# Altium PCB transistor_tester_V1.07_E3.PcbDoc (part 2 of 2)
Units mil, origin at the board's own origin, x right, y up, seen from the top; angles counter-clockwise.
Board outline 8661.42 x 7437.01 mil, 4 copper layers (Component Side, Ground Plane, Power Plane, Solder Side), stack 33.234 mil thick; 260 components, 161 nets, 897 pads, 860 vias.
Unrouted connection lines stored in the file: 9.
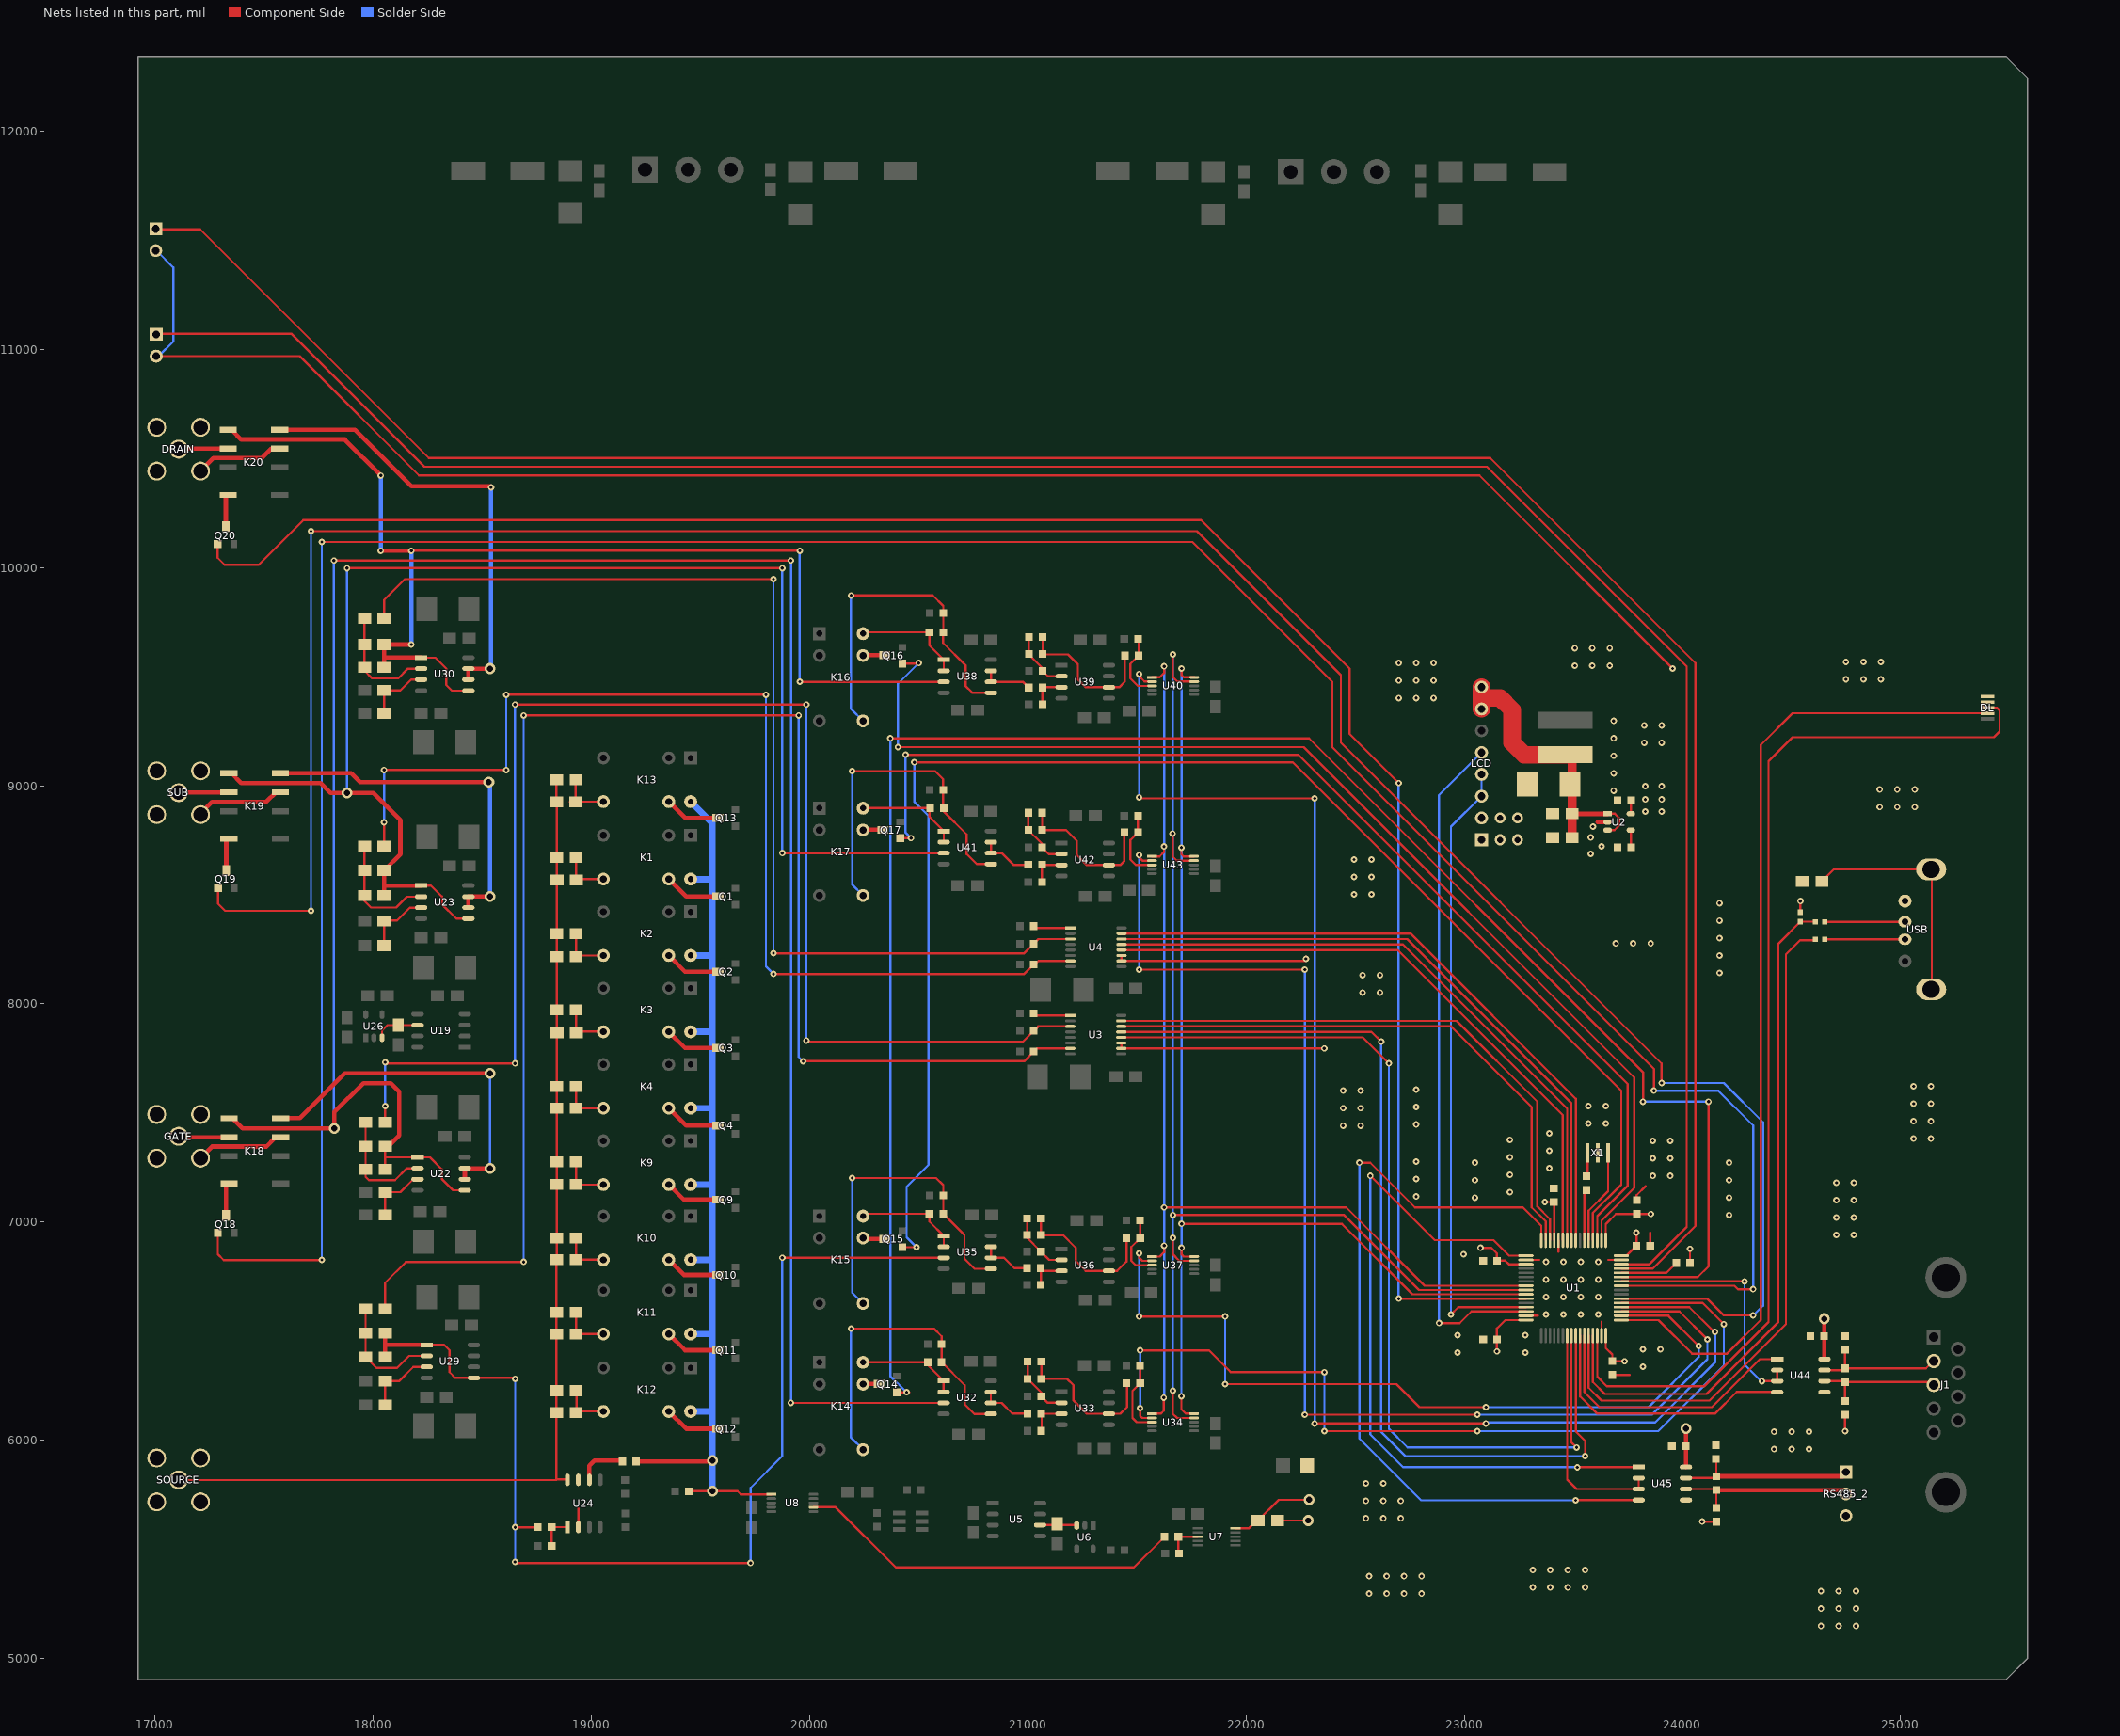
[diagram p4: the nets of this part, all layers, seen from the top]

## Via types
v1: diameter 30/30 (per signal layer), hole 14, Component Side to Solder Side, 720 vias
v2: diameter 50, hole 28, Component Side to Solder Side, 86 vias
v3: diameter 30, hole 14, Component Side to Solder Side, 50 vias
v4: diameter 66.93, hole 47.24, Component Side to Solder Side, 2 vias
v5: diameter 39.37, hole 29.53, Component Side to Solder Side, 2 vias

## Nets (pads, with @x,y where several pads share a name; then routed paths per layer and width w, separated by ;. In a path a pad name is that pad's centre, name@x,y a point inside that pad or via, vN(x,y) a via of type N, cw(c..) or ccw(c..) an arc to the next point about the centre after c; other vN are vias at no path point) (continued)
CTRL14: Q14.1 U1.59 | length 8779
  Component Side w10: v1(20369.38,9217.27) 22289.38,9217.27 23819.38,7687.27 v1(23819.38,7552.27) ; Q14.1@20399.2,6220.02 v1(20443.92,6220.02) v1@20456.17,6220.02 ; U1.59@23719.61,6747.92 24070.03,6747.92 24119.38,6797.27 v1(24119.38,7552.27)
  Solder Side w10: v1(20369.38,9217.27) 20369.38,6294.56 v1(20443.92,6220.02) ; v1(23819.38,7552.27) v1(24119.38,7552.27)
CTRL15: Q15.1 U1.4 | length 6983.9
  Component Side w10: Q15.1@20424.66,6885.02 v1(20489.38,6885.02) v1@20497.13,6885.02 ; v1(20479.38,9107.27) 22214.38,9107.27 23719.38,7602.27 23719.38,7172.27 23589.69,7042.57 U1.4@23589.69,6917.21
  Solder Side w10: v1(20479.38,9107.27) 20479.38,8927.27 20544.38,8862.27 20544.38,7262.27 20444.38,7162.27 20444.38,6930.02 v1(20489.38,6885.02)
CTRL16: Q16.1 U1.2 | length 5301.2
  Component Side w10: v1(20404.38,9177.27) 22264.38,9177.27 23779.38,7662.27 23779.38,7157.27 23629.06,7006.94 U1.2@23629.06,6917.21 ; Q16.1@20424.66,9560.02 v1@20491.62,9560.02
  Solder Side w10: v1(20404.38,9177.27) 20404.38,9467.27 v1(20499.38,9562.27)
CTRL17: Q17.1 U1.3 | length 5150.8
  Component Side w10: Q17.1@20414.66,8760.02 v1(20464.38,8760.02) ; v1(20439.38,9142.27) 22239.38,9142.27 23749.38,7632.27 23749.38,7167.27 23609.37,7027.26 U1.3@23609.37,6917.21
  Solder Side w10: v1(20439.38,9142.27) 20439.38,8785.02 v1(20464.38,8760.02)
CTRL18: Q18.1 U1.57 | length 13189.9
  Component Side w10: Q18.1@17287.27,6950.56 17287.27,6853.08 17314.51,6825.84 v1@17764.51,6825.84 ; v1(17764.38,10117.27) 21754.38,10117.27 22394.38,9477.27 22394.38,9177.27 23869.38,7702.27 v1(23869.38,7602.27) ; U1.57@23719.61,6708.55 24238.1,6708.55 24254.38,6692.27 v1(24324.38,6692.27) 24269.38,6692.27
  Solder Side w10: v1(17764.38,6827.27) v1(17764.38,10117.27) ; v1@23874.38,7602.27 24164.38,7602.27 24324.38,7442.27 v1(24324.38,6692.27)
CTRL19: Q19.1 U1.54 | length 11805.3
  Component Side w10: Q19.1@17288.31,8531.6 17288.31,8459.13 17320.56,8426.88 v1@17715.56,8426.88 ; v1(17714.38,10167.27) 21774.38,10167.27 22434.38,9507.27 22434.38,9197.27 23904.38,7727.27 v1(23904.38,7637.27) ; U1.54@23719.61,6649.49 24112.16,6649.49 24189.38,6572.27 v1(24324.38,6572.27)
  Solder Side w10: v1(17714.38,8427.27) v1(17714.38,10167.27) ; v1(23904.38,7637.27) 24189.38,7637.27 24369.38,7457.27 24369.38,6617.27 v1(24324.38,6572.27)
CTRL20: Q20.1 U1.27 | length 9194.5
  Component Side w10: Q20.1@17286.33,10107.33 17286.33,10044.85 17318.58,10012.61 17474.72,10012.61 17679.38,10217.27 21794.38,10217.27 22474.38,9537.27 22474.38,9237.27 v1(22699.38,9012.27) ; v1(22699.38,6649.49) U1.27@23282.6,6649.49
  Solder Side w10: v1(22699.38,6649.49) v1(22699.38,9012.27)
D1: K1.5 Q1.3 | length 258.1
  Component Side w20: K1.5@19354.38,8572.27 19433.62,8493.02 Q1.3@19579.66,8493.02
D2: K2.5 Q2.3 | length 271
  Component Side w20: K2.5@19354.38,8222.27 19428.62,8148.02 Q2.3@19579.66,8148.02
  Solder Side w10: K2.5@19354.38,8207.27 K2.5@19354.38,8222.27
D3: K3.5 Q3.3 | length 256
  Component Side w20: K3.5@19354.38,7872.27 19428.62,7798.02 Q3.3@19579.66,7798.02
D3V3: C1.2 C2.2 C3.2 C4.2 C5.2 C6.2 C22.2 C29.2 C77.2 C108.2 LED0.2 LED1.2 R42.1 R102.2 R105.2 U1.1 U1.13 U1.19 U1.32 U1.48 U1.64 U2.5 U3.10 U3.11 U4.10 U4.11 U7.10 U44.8 U45.8 | length 12372.6
  Component Side w10: LED1.2@16989.04,10969.18 17662.47,10969.18 18209.38,10422.27 23069.38,10422.27 v1(23954.38,9537.27) ; U3.11@21428.24,7821.28 U3.10@21428.24,7796.08 v1(22358.2,7796.08) ; U4.11@21429.03,8222.07 U4.10@21429.03,8196.87 22268.99,8196.87 22274.38,8202.27 v1(22274.38,8207.27) v1@22274.38,8217.27 ; U7.10@21950.64,5597.27 22014.38,5597.27 C77.2@22069.38,5652.27 ; C77.2@22054.38,5632.27 22149.38,5727.27 v2(22289.38,5727.27) ; v1(23074.38,6882.27) 23124.38,6882.27 23149.62,6857.03 C2.2@23149.62,6823.01 23188.63,6823.01 23204.68,6806.97 U1.19@23282.6,6806.97 ; v1(23149.62,6407.5) C6.2@23149.62,6463.01 23149.62,6512.5 23188.18,6551.06 U1.32@23282.6,6551.06 ; v1@23359.62,7092.03 C1.2@23410.13,7092.03 ; U1.13@23412.52,6917.21 C1.2@23412.52,7092.03 ; U1.48@23648.74,6480.2 23648.74,6422.9 23678.63,6393.01 C5.2@23678.63,6362.5 v1@23734.62,6362.5 ; U1.1@23648.74,6917.21 23648.74,6990.64 23695.13,7037.03 C4.2@23790.13,7037.03 v1(23854.62,7037.03) ; U1.64@23719.61,6846.34 23743.97,6846.34 C3.2@23789.14,6891.52 v1(23789.14,6952.03) ; U2.5@23763.4,8871.44 C22.2@23763.4,8931.79 ; v1(24089.62,5627.03) R105.2@24155.13,5627.03 ; R42.1@24540.4,8420.26 v1(24540.4,8471.24) ; v2(24650.91,6557.27) v2@24650.91,6570.73 ; v1(24745.13,6041.52) R102.2@24745.13,6117.03
  Component Side w20: U45.8@24015.91,5877.27 v2(24015.91,6053.8) ; U44.8@24650.91,6372.27 v2(24650.91,6557.27)
  Solder Side w10: LED1.2@17004.94,10968.7 17016.38,10968.7 17083.75,11036.07 17083.75,11374.96 LED0.2@17005.72,11452.99
  other v1: 23734.38,6362.27 23369.38,7092.27 23829.38,8882.27 23904.38,8882.27 23829.38,8937.27 23904.38,8937.27 23829.38,8997.27 23904.38,8997.27
D4: K4.5 Q4.3 | length 258.1
  Component Side w20: K4.5@19354.38,7522.27 19433.62,7443.02 Q4.3@19579.66,7443.02
D5V0: C57.2 C58.2 C59.1 L2.2 LCD.7 LCD.8 U2.1 U2.3 | length 1367.8
  Component Side w10: U2.3@23657.1,8796.64 23688.75,8796.64 23709.38,8817.27 23709.38,8852.27 23690.21,8871.44 U2.1@23657.1,8871.44
  Component Side w22: C58.2@23495.21,8871.44 U2.1@23657.1,8871.44
  Component Side w40: C57.2@23494.84,8762.72 23494.84,8997.27 L2.2@23494.84,9132.03
  Component Side w80: LCD.7@23079.38,9352.27 LCD.8@23079.38,9452.27 ; 23079.38,9402.27 23164.38,9402.27 23219.38,9347.27 23219.38,9197.27 23274.38,9142.27 L2.2@23464.38,9142.27
D9: K9.5 Q9.3 | length 254
  Component Side w20: K9.5@19354.38,7172.27 19423.62,7103.02 Q9.3@19579.66,7103.02
D10: K10.5 Q10.3 | length 254
  Component Side w20: K10.5@19354.38,6827.27 19423.62,6758.02 Q10.3@19579.66,6758.02
D11: K11.5 Q11.3 | length 256
  Component Side w20: K11.5@19354.38,6487.27 19428.62,6413.02 Q11.3@19579.66,6413.02
D12: K12.5 Q12.3 | length 258.1
  Component Side w20: K12.5@19354.38,6132.27 19433.62,6053.02 Q12.3@19579.66,6053.02
D13: K13.5 Q13.3 | length 246.1
  Component Side w20: K13.5@19354.38,8927.27 19429.38,8852.27 Q13.3@19569.38,8852.27
D14: K14.5 Q14.3 | length 74.8
  Component Side w20: K14.5@20244.38,6258.02 Q14.3@20319.2,6258.02
D15: K15.5 Q15.3 | length 75.3
  Component Side w20: K15.5@20244.38,6923.02 Q15.3@20319.66,6923.02
D16: K16.5 Q16.3 | length 80.3
  Component Side w20: K16.5@20244.38,9598.02 Q16.3@20324.66,9598.02
D17: K17.5 Q17.3 | length 90.3
  Component Side w20: K17.5@20244.38,8798.02 Q17.3@20334.66,8798.02
D18: K18.8 Q18.3 | length 148.3
  Component Side w20: Q18.3@17325.27,7030.56 K18.8@17325.27,7178.86
D19: K19.8 Q19.3 | length 143.3
  Component Side w20: Q19.3@17326.31,8611.6 K19.8@17326.31,8754.91
D20: K20.8 Q20.3 | length 143.3
  Component Side w20: Q20.3@17324.33,10187.33 K20.8@17324.33,10330.63
DAC1_FSYNC: U1.41 U3.13 | length 4551
  Component Side w10: U3.13@21428.24,7871.67 22574.97,7871.67 v1(22619.38,7827.27) ; U1.41@23510.95,6480.2 23510.95,6040.7 23554.38,5997.27 v1(23554.38,5927.27)
  Solder Side w10: v1(22619.38,7827.27) 22619.38,6037.27 22729.38,5927.27 v1(23554.38,5927.27)
DAC1_RESET: U1.14 U3.15 | length 2718.6
  Component Side w10: U3.15@21428.24,7922.07 22964.58,7922.07 23334.38,7552.27 23334.38,7072.27 23392.84,7013.81 U1.14@23392.84,6917.21
DAC1_SCLK: U1.40 U3.12 | length 4368.2
  Component Side w10: U3.12@21428.24,7846.48 22535.17,7846.48 v1(22654.38,7727.27) ; U1.40@23491.26,6480.2 23491.26,5990.38 v1(23514.38,5967.27)
  Solder Side w10: v1(22654.38,7727.27) 22654.38,6052.27 22739.38,5967.27 v1(23514.38,5967.27)
DAC1_SDATA: U1.15 U3.14 | length 2671
  Component Side w10: U3.14@21428.24,7896.87 22939.77,7896.87 ; 22939.58,7897.07 22939.77,7896.87 ; U1.15@23373.15,6917.21 23373.15,7003.49 23309.38,7067.27 23309.38,7527.27 22939.77,7896.87
DAC2_FSYNC: U1.10 U4.13 | length 2957.1
  Component Side w10: U4.13@21429.03,8272.46 22719.18,8272.46 23471.58,7520.07 U1.10@23471.58,6917.21
DAC2_RESET: U1.8 U4.15 | length 3044
  Component Side w10: U4.15@21429.03,8322.86 22753.79,8322.86 23510.95,7565.7 U1.8@23510.95,6917.21
DAC2_SCLK: U1.11 U4.12 | length 2909.2
  Component Side w10: U4.12@21429.03,8247.27 22694.38,8247.27 23451.89,7489.75 U1.11@23451.89,6917.21
DAC2_SDATA: U1.9 U4.14 | length 3002
  Component Side w10: U4.14@21429.03,8297.66 22738.99,8297.66 23491.26,7545.38 U1.9@23491.26,6917.21
DGND: C1.1 C2.1 C3.1 C4.1 C5.1 C6.1 C21.1 C22.1 C29.1 C57.1 C58.1 C59.2 C77.1 C108.1 DL.5 L1.2 L3.2 LCD.1 LCD.2 R2.2 R101.2 R104.2 RS485_2.3 U1.12 U1.18 U1.31 U1.47 U1.63 U2.2 U44.5 U45.5 USB.4 X1.2 | length 764.3
  Component Side w10: C77.1@22144.38,5632.27 v2(22284.38,5632.27) ; U1.31@23282.6,6570.75 23337.86,6570.75 ; U1.18@23282.6,6826.66 23343.77,6826.66 ; 23432.21,6864.44 U1.12@23432.21,6917.21 ; U1.47@23629.06,6480.2 23629.06,6543.74 ; 23659.99,6826.66 U1.63@23719.61,6826.66 ; C5.1@23678.63,6299.51 23757.68,6299.51 ; C4.1@23790.13,7100.02 23790.13,7123.71 23831.7,7165.28 ; C3.1@23852.14,6891.52 23852.14,6951.45 ; R2.2@24034.62,6813.01 v1(24034.62,6877.5)
  Component Side w20: 23611.15,8834.04 U2.2@23657.1,8834.04
  other v1: 24635.03,5148.34 24715.03,5148.34 24795.03,5148.34 24635.03,5228.34 24715.03,5228.34 24795.03,5228.34 22564.38,5297.27 22644.38,5297.27 22724.38,5297.27 22804.38,5297.27 24635.03,5308.34 24715.03,5308.34 24795.03,5308.34 23314.57,5325.13 23394.57,5325.13 23474.57,5325.13 23554.57,5325.13 22564.38,5377.27 22644.38,5377.27 22724.38,5377.27 22804.38,5377.27 23314.57,5405.13 23394.57,5405.13 23474.57,5405.13 23554.57,5405.13 22549.38,5642.27 22629.38,5642.27 22709.38,5642.27 22549.38,5722.27 22629.38,5722.27 22709.38,5722.27 22549.38,5802.27 22629.38,5802.27 24419.84,5959.26 24499.84,5959.26 24579.84,5959.26 24419.84,6039.26 24499.84,6039.26 24579.84,6039.26 23819.38,6337.27 22969.38,6402.27 23279.38,6402.27 23819.38,6417.27 23899.38,6417.27 22969.38,6482.27 23279.38,6482.27 23374.38,6577.27 23454.38,6577.27 23534.38,6577.27 23614.38,6577.27 23374.38,6657.27 23454.38,6657.27 23534.38,6657.27 23614.38,6657.27 23374.38,6737.27 23454.38,6737.27 23534.38,6737.27 23614.38,6737.27 23374.38,6817.27 23454.38,6817.27 23534.38,6817.27 23614.38,6817.27 22996.59,6852.76 24705.82,6940.97 24785.82,6940.97 24705.82,7020.97 24785.82,7020.97 24214.38,7032.27 24705.82,7100.97 24785.82,7100.97 23049.38,7112.27 24214.38,7112.27 22779.38,7117.27 23209.38,7137.27 24705.82,7180.97 24785.82,7180.97 23049.38,7192.27 24214.38,7192.27 22779.38,7197.27 23864.38,7212.27 23944.38,7212.27 23209.38,7217.27 23389.38,7247.27 23049.38,7272.27 24214.38,7272.27 22779.38,7277.27 23864.38,7292.27 23944.38,7292.27 23209.38,7297.27 23389.38,7327.27 23864.38,7372.27 23944.38,7372.27 23209.38,7377.27 25059.38,7382.27 25139.38,7382.27 23389.38,7407.27 22444.38,7442.27 22524.38,7442.27 22779.38,7447.27 23569.38,7452.27 23649.38,7452.27 25059.38,7462.27 25139.38,7462.27 22444.38,7522.27 22524.38,7522.27 22779.38,7527.27 23569.38,7532.27 23649.38,7532.27 25059.38,7542.27 25139.38,7542.27 22444.38,7602.27 22524.38,7602.27 22779.38,7607.27 25059.38,7622.27 25139.38,7622.27 22534.38,8052.27 22614.38,8052.27 22534.38,8132.27 22614.38,8132.27 24169.38,8142.27 24169.38,8222.27 23694.38,8277.27 23774.38,8277.27 23854.38,8277.27 24169.38,8302.27 24169.38,8382.27 24169.38,8462.27 22494.38,8502.27 22574.38,8502.27 22494.38,8582.27 22574.38,8582.27 22494.38,8662.27 22574.38,8662.27 23579.38,8687.27 23629.38,8722.27 23579.38,8762.27 23589.38,8812.27 24904.38,8902.27 24984.38,8902.27 25064.38,8902.27 23684.38,8977.27 24904.38,8982.27 24984.38,8982.27 25064.38,8982.27 23684.38,9057.27 23684.38,9137.27 23824.38,9197.27 23904.38,9197.27 23684.38,9217.27 23824.38,9277.27 23904.38,9277.27 23684.38,9297.27 22699.38,9402.27 22779.38,9402.27 22859.38,9402.27 22699.38,9482.27 22779.38,9482.27 22859.38,9482.27 24749.38,9487.27 24829.38,9487.27 24909.38,9487.27 23506.79,9550.68 23586.79,9550.68 23666.79,9550.68 22699.38,9562.27 22779.38,9562.27 22859.38,9562.27 24749.38,9567.27 24829.38,9567.27 24909.38,9567.27 23506.79,9630.68 23586.79,9630.68 23666.79,9630.68
  other v2: 23164.38,8752.27 23244.38,8752.27 23164.38,8852.27 23244.38,8852.27
DRAIN_GUARD: K20.4 U30.6 U30.7 | length 2050
  Component Side w20: K20.4@17559.33,10631.53 17915.12,10631.53 18174.38,10372.27 18534.38,10372.27 v3(18539.38,10367.27) ; U30.6@18435.91,9497.27 U30.7@18435.91,9527.27 ; U30.7@18435.91,9536.87 v2@18534.38,9536.87
  Solder Side w20: v2(18534.38,9537.27) 18539.38,9542.27 v3(18539.38,10367.27)
DRAIN_OUT: C74.1 R24.1 U4.3 | length 5017.2
  Component Side w10: R24.1@18049.38,9767.27 18049.38,9852.27 18144.38,9947.27 v3(19834.38,9947.27) ; v3@19829.38,8232.27 v3(19834.38,8232.27) 20982.88,8232.27 C74.1@21027.14,8276.52 21048.28,8297.66 U4.3@21195.17,8297.66
  Solder Side w10: v3(19834.38,8232.27) v3(19834.38,9947.27)
DRAIN_SIGNAL: C38.2 K20.5 R25.2 U30.1 U30.5 U38.3 | length 5433
  Component Side w10: v3(18174.38,10077.27) v3(19954.38,10077.27) ; U30.1@18219.38,9587.27 18284.38,9587.27 18334.38,9537.27 18334.38,9462.27 18360.56,9436.08 U30.5@18435.91,9436.08 ; v3@19954.38,9476.48 U38.3@20614.38,9476.48
  Component Side w20: K20.5@17354.38,10627.27 17394.38,10587.27 17869.38,10587.27 v3(18034.38,10422.27) ; v3(18034.38,10077.27) v3(18174.38,10077.27) ; R25.2@18049.38,9542.27 18049.38,9587.27 ; v3@18164.38,9647.27 C38.2@18049.38,9647.27 18049.38,9587.27 ; U30.1@18219.38,9587.27 18049.38,9587.27
  Solder Side w10: v3(19954.38,9477.27) v3(19954.38,10077.27)
  Solder Side w20: v3(18034.38,10077.27) v3(18034.38,10422.27) ; v3(18174.38,9647.27) v3(18174.38,10077.27)
GATE_GUARD: K18.4 U22.6 U22.7 | length 1661.1
  Component Side w20: K18.4@17559.33,7476.53 17663.64,7476.53 17869.38,7682.27 v2(18534.38,7682.27) ; U22.6@18419.38,7196.48 U22.7@18419.38,7246.87 v2(18534.38,7246.87)
  Solder Side w10: v2(18534.38,7246.87) v2(18534.38,7682.27)
GATE_OUT: C71.1 R14.1 U3.3 | length 6625.9
  Component Side w10: R14.1@18054.38,7457.27 v3(18054.38,7532.27) ; v3(18054.38,7732.27) 18059.38,7727.27 v3(18649.38,7727.27) ; v3(18649.38,9372.27) v3(19984.38,9372.27) ; v3@19984.38,7827.27 20977.88,7827.27 C71.1@21027.14,7876.52 21047.49,7896.87 U3.3@21194.38,7896.87
  Solder Side w10: v3(18054.38,7532.27) v3(18054.38,7732.27) ; v3(18649.38,7727.27) v3@18649.38,9367.27 ; v3(19984.38,7832.27) v3(19984.38,9372.27)
GATE_SIGNAL: C40.2 K18.5 R15.2 U22.1 U22.5 U32.3 | length 11027.3
  Component Side w10: v3(17819.38,10032.27) v3(19914.38,10032.27) ; R15.2@18054.38,7242.27 C40.2@18054.38,7347.27 ; 18059.38,7297.27 U22.1@18202.84,7297.27 18259.38,7297.27 18314.38,7242.27 18314.38,7197.27 18365.56,7146.08 U22.5@18419.38,7146.08 ; v3@19908.59,6171.48 U32.3@20613.92,6171.48
  Component Side w20: K18.5@17358.38,7473.27 17401.38,7430.27 v2(17821.38,7430.27) 17821.38,7504.27 17954.38,7637.27 18079.38,7637.27 18119.38,7597.27 18119.38,7397.27 18069.38,7347.27 C40.2@18054.38,7347.27
  Solder Side w10: v3(17819.38,10032.27) 17819.38,7432.27 v2(17821.38,7430.27) ; v3(19914.38,6172.27) v3(19914.38,10032.27)
LED0: LED0.1 U1.61 | length 10879.9
  Component Side w10: LED0.1@17003.35,11549.96 17206.68,11549.96 18254.38,10502.27 23119.38,10502.27 24059.38,9562.27 24059.38,6982.27 23864.4,6787.29 U1.61@23719.61,6787.29
LED1: LED1.1 U1.62 | length 10586
  Component Side w10: LED1.1@17004.79,11070.91 17625.73,11070.91 18234.38,10462.27 23104.38,10462.27 24019.38,9547.27 24019.38,6977.27 23849.08,6806.97 U1.62@23719.61,6806.97
M_ADC_CS1: U1.53 U34.2 | length 4184.4
  Component Side w10: v1(21514.38,6147.27) 21514.38,6112.27 21524.06,6102.58 U34.2@21568.92,6102.58 ; v1(21514.38,6412.27) 21829.38,6412.27 21929.38,6312.27 v1(22359.38,6312.27) ; v1(22359.38,6042.27) v1(23059.38,6042.27) ; U1.53@23719.61,6629.8 23720.15,6629.27 24092.38,6629.27 v1(24189.38,6532.27)
  Solder Side w10: v1(21514.38,6147.27) v1(21514.38,6412.27) v1@21514.38,6422.27 ; v1(22359.38,6042.27) v1(22359.38,6312.27) ; v1@23054.38,6042.27 v1(23059.38,6042.27) 23889.38,6042.27 24189.38,6342.27 v1(24189.38,6532.27)
M_ADC_CS2: U1.50 U37.2 | length 3852
  Component Side w10: v1(21509.38,6567.27) v1(21904.38,6567.27) ; v1(21509.38,6857.27) 21509.38,6837.27 21524.06,6822.58 U37.2@21569.38,6822.58 ; v1(21904.38,6257.27) 22689.38,6257.27 22794.38,6152.27 v1(23099.38,6152.27) ; U1.50@23719.61,6570.75 23935.9,6570.75 v1(24074.38,6432.27)
  Solder Side w10: v1(21509.38,6567.27) v1(21509.38,6857.27) ; v1(21904.38,6257.27) v1(21904.38,6567.27) ; v1(23099.38,6152.27) 23844.38,6152.27 24074.38,6382.27 v1(24074.38,6432.27)
M_ADC_CS3: U1.52 U40.2 | length 6882.1
  Component Side w10: v1@21509.38,8942.27 v1(22314.38,8942.27) ; v1@21509.38,9502.27 21534.06,9477.58 U40.2@21569.38,9477.58 U40.2@21574.38,9477.58 ; v1@22309.38,6077.27 v1(22314.38,6077.27) v1(23099.38,6077.27) ; U1.52@23719.61,6610.12 24031.53,6610.12 24141.88,6499.77 v1@24151.88,6499.77
  Solder Side w10: v1(21509.38,8947.27) v1(21509.38,9512.27) ; v1(22314.38,6077.27) v1(22314.38,8942.27) ; v1@23099.38,6082.27 23874.38,6082.27 24149.38,6357.27 v1(24149.38,6497.27)
M_ADC_CS4: U1.51 U43.2 | length 5889.4
  Component Side w10: v1(21509.38,8157.27) v1(22269.38,8157.27) ; v1(21509.38,8682.27) 21509.38,8672.9 21524.38,8657.9 21524.38,8656.64 U43.2@21568.43,8656.64 ; v1(22269.38,6117.27) v1(23059.38,6117.27) ; U1.51@23719.61,6590.43 23986.21,6590.43 v1(24114.38,6462.27)
  Solder Side w10: v1(21509.38,8157.27) v1(21509.38,8682.27) ; v1(22269.38,6117.27) v1(22269.38,8157.27) ; v1(23059.38,6117.27) 23859.38,6117.27 24114.38,6372.27 v1(24114.38,6462.27)
M_ADC_DIN: U1.26 U34.10 U37.10 U40.10 U43.10 | length 5449
  Component Side w10: v1(21703.43,8716.32) 21703.43,8686.32 21713.43,8676.32 U43.10@21761.35,8676.32 ; v1(21703.92,6202.27) 21703.92,6142.27 21723.92,6122.27 U34.10@21761.84,6122.27 ; v1(21704.38,6882.27) 21704.38,6852.27 21714.38,6842.27 U37.10@21762.29,6842.27 ; v1(21704.38,6992.27) 22439.38,6992.27 22762.47,6669.18 U1.26@23282.6,6669.18 ; v1(21704.38,9537.27) 21704.38,9507.27 21714.38,9497.27 U40.10@21762.29,9497.27
  Solder Side w10: v1(21703.92,6202.27) v1@21703.92,6881.81 ; v1(21704.38,6882.27) v1(21704.38,6992.27) v1(21704.38,9537.27)
M_ADC_DOUT: U1.25 U34.9 U37.9 U40.9 U43.9 | length 5953.9
  Component Side w10: v1(21663.43,8781.32) 21663.43,8676.32 21683.12,8656.64 U43.9@21761.35,8656.64 ; v1(21663.92,6227.27) 21663.92,6122.27 21683.61,6102.58 U34.9@21761.84,6102.58 ; v1(21664.38,6927.27) 21664.38,6852.27 21694.06,6822.58 U37.9@21762.29,6822.58 ; v1(21664.38,7032.27) 22449.38,7032.27 22792.79,6688.86 U1.25@23282.6,6688.86 ; v1(21664.38,9602.27) 21664.38,9497.27 21684.06,9477.58 U40.9@21762.29,9477.58
  Solder Side w10: v1@21664.38,6227.27 v1(21664.38,6927.27) v1(21664.38,7032.27) v1(21664.38,9602.27)
M_ADC_SCLK: U1.24 U34.1 U37.1 U40.1 U43.1 | length 5542.4
  Component Side w10: U43.1@21568.43,8676.32 21603.43,8676.32 21623.43,8696.32 v1(21623.43,8721.32) ; U34.1@21568.92,6122.27 21608.92,6122.27 21622.67,6136.02 v1(21622.67,6196.02) ; U37.1@21569.38,6842.27 21604.38,6842.27 21624.38,6862.27 v1@21624.38,6887.27 ; U40.1@21569.38,9497.27 21604.38,9497.27 21624.38,9517.27 v1@21624.38,9542.27 ; v1(21624.38,7067.27) 22459.38,7067.27 22818.1,6708.55 U1.24@23282.6,6708.55
  Solder Side w10: v1(21622.67,6196.02) v1@21623.92,6197.27 ; v1@21624.38,6197.72 v1(21624.38,6892.27) v1(21624.38,7067.27) v1(21624.38,9547.27)
NetC21_2: C21.2 U2.4 | length 77.4
  Component Side w10: C21.2@23763.4,8719.23 U2.4@23763.4,8796.64
NetC38_1: C38.1 R24.2 R25.1 U30.2 | length 518
  Component Side w10: R24.2@17959.38,9752.27 C38.1@17959.38,9647.27 R25.1@17959.38,9542.27 17959.38,9527.27 17994.38,9492.27 18114.38,9492.27 18158.99,9536.87 U30.2@18219.38,9536.87
NetC39_1: C39.1 R20.1 R21.2 U23.2 | length 543
  Component Side w10: R21.2@17959.38,8722.27 C39.1@17959.38,8612.27 R20.1@17959.38,8497.27 17959.38,8472.27 17989.38,8442.27 18104.38,8442.27 18153.99,8491.87 U23.2@18219.38,8491.87
NetC40_1: C40.1 R14.2 R15.1 U22.2 | length 517.3
  Component Side w10: R14.2@17964.38,7457.27 C40.1@17964.38,7347.27 R15.1@17964.38,7242.27 17964.38,7207.27 17979.38,7192.27 18099.38,7192.27 18153.99,7246.87 U22.2@18202.84,7246.87
NetC41_2: C41.2 R18.2 R19.1 U29.2 | length 543.3
  Component Side w10: R18.2@17964.38,6602.27 C41.2@17964.38,6492.27 R19.1@17964.38,6382.27 18014.38,6332.27 18109.38,6332.27 18163.99,6386.87 U29.2@18244.38,6386.87
NetC63_1: C63.1 K1.4 R4.2 | length 209.7
  Component Side w10: C63.1@18929.38,8573.55 R4.2@18929.38,8658.29 ; C63.1@18934.38,8572.27 K1.4@19054.38,8572.27 K1.4@19059.38,8572.27
NetC63_2: C63.2 C64.2 C65.2 C66.2 C100.2 C101.2 C102.2 C103.2 C104.2 R4.1 R5.1 R6.1 R7.1 R46.1 R47.1 R48.1 R49.1 R50.1 SOURCE.1 U24.8 | length 5150.2
  Component Side w10: SOURCE.1@17072.21,5817.58 18839.38,5817.58 C103.2@18839.38,6127.27 R49.1@18839.38,6222.27 ; C104.2@18839.14,8926.52 R50.1@18839.14,9007.54 ; 18839.38,5820.88 18877.84,5820.88 ; R49.1@18839.38,6227.27 C102.2@18839.38,6487.27 R48.1@18839.38,6587.27 C101.2@18839.38,6827.27 ; C65.2@18840.92,7883.8 R6.1@18840.92,7957.91 ; C63.2@18840.92,8574.02 R4.1@18840.92,8658.76 ; C101.2@18841.39,6827.27 C65.2@18841.39,7868.44 C63.2@18841.39,8567.27 C104.2@18841.39,8927.27
NetC64_1: C64.1 K2.4 R5.2 | length 203.9
  Component Side w10: C64.1@18929.38,8223.12 R5.2@18929.38,8307.86 ; C64.1@18940.23,8222.27 K2.4@19054.38,8222.27 K2.4@19059.38,8222.27
NetC65_1: C65.1 K3.4 R6.2 | length 204.3
  Component Side w10: C65.1@18928.91,7873.17 R6.2@18928.91,7957.91 ; C65.1@18933.91,7873.17 K3.4@19053.48,7873.17
NetC66_1: C66.1 K4.4 R7.2 | length 225
  Component Side w10: R7.2@18929.38,7622.27 C66.1@18929.38,7522.27 K4.4@19054.38,7522.27
NetC73_1: C73.1 U4.1 | length 165.8
  Component Side w10: C73.1@21029.38,8348.05 U4.1@21195.17,8348.05
NetC76_1: C76.1 U3.1 | length 158
  Component Side w10: C76.1@21036.39,7947.27 U3.1@21194.38,7947.27
NetC80_1: C80.1 R13.2 U7.3 | length 163.7
  Component Side w10: C80.1@21689.62,5484.04 R13.2@21689.62,5557.9 ; R13.2@21689.62,5558.01 R13.2@21689.62,5557.9 ; U7.3@21779.38,5557.9 R13.2@21689.62,5557.9
NetC91_2: C91.2 U5.6 U6.3 | length 167.8
  Component Side w10: U5.6@21055.91,5611.48 U6.3@21223.75,5611.48
NetC92_2: C92.2 U19.6 U26.3 | length 206.2
  Component Side w10: U26.3@18040.01,7844.98 18040.01,7877.9 18065.17,7903.05 U19.6@18202.84,7903.05
NetC100_1: C100.1 K9.4 R46.2 | length 230.6
  Component Side w10: R46.2@18929.38,7277.27 C100.1@18929.38,7172.27 18929.66,7171.99 C100.1@18929.66,7176.99 ; C100.1@18933.91,7171.99 K9.4@19054.1,7171.99
NetC101_1: C101.1 K10.4 R47.2 | length 198
  Component Side w10: C101.1@18929.38,6842.27 R47.2@18929.38,6927.27 ; C101.1@18941.39,6827.27 K10.4@19054.38,6827.27
NetC102_1: C102.1 K11.4 R48.2 | length 216
  Component Side w10: C102.1@18929.38,6494.27 R48.2@18929.38,6587.27 ; C102.1@18931.39,6487.27 K11.4@19054.38,6487.27
NetC103_1: C103.1 K12.4 R49.2 | length 210.2
  Component Side w10: C103.1@18932.14,6131.52 C103.1@18932.14,6132.27 ; R49.2@18932.14,6219.51 C103.1@18932.14,6132.27 ; K12.4@19054.38,6132.27 C103.1@18932.14,6132.27
NetC104_1: C104.1 K13.4 R50.2 | length 232.5
  Component Side w10: C104.1@18902.14,8926.52 C104.1@18927.14,8927.27 ; R50.2@18927.14,9007.54 C104.1@18927.14,8927.27 ; K13.4@19054.38,8927.27 C104.1@18927.14,8927.27
NetC128_1: C128.1 R65.1 R66.2 U33.6 | length 686.5
  Component Side w10: C128.1@21062.14,6361.52 R65.1@21062.14,6281.52 21180.13,6281.52 21209.38,6252.27 21209.38,6182.27 21270.17,6121.48 U33.6@21370.91,6121.48 21423.59,6121.48 21454.38,6152.27 R66.2@21454.38,6246.52
NetC128_2: C128.2 R64.1 R65.2 U33.2 | length 290.6
  Component Side w10: C128.2@20999.14,6361.52 R65.2@20999.14,6281.52 21062.14,6218.53 R64.1@21062.14,6201.52 21091.78,6171.87 U33.2@21154.38,6171.87
NetC131_2: C131.2 R66.1 U34.3 | length 353
  Component Side w10: C131.2@21514.62,6343.01 21514.62,6261.99 21479.38,6226.75 21479.38,6102.27 21499.06,6082.58 U34.3@21568.92,6082.58
NetC138_2: C138.2 R73.1 U37.3 | length 305.2
  Component Side w10: R73.1@21514.62,6926.99 C138.2@21514.62,7008.01 ; R73.1@21515.09,6926.52 21474.38,6885.81 21474.38,6822.27 21493.75,6802.9 U37.3@21569.38,6802.9
NetC142_1: C142.1 R72.1 R73.2 U36.6 | length 695.6
  Component Side w10: C142.1@21060.09,7016.52 R72.1@21060.09,6940.64 21161,6940.64 21219.38,6882.27 21219.38,6822.27 21265.17,6776.48 U36.6@21370.91,6776.48 21408.59,6776.48 21452.1,6819.98 R73.2@21452.1,6926.52
NetC142_2: C142.2 R71.1 R72.2 U36.2 | length 287.8
  Component Side w10: C142.2@20997.1,7016.52 R72.2@20997.1,6940.64 20997.1,6927.76 R71.1@21060.09,6864.77 21097.98,6826.87 U36.2@21154.38,6826.87
NetC149_2: C149.2 R80.1 U40.3 | length 310.6
  Component Side w10: C149.2@21507.14,9673.01 R80.1@21507.14,9596.52 21469.38,9558.76 21469.38,9492.27 21503.75,9457.9 U40.3@21569.38,9457.9
NetC158_1: C158.1 R79.1 R80.2 U39.6 | length 682.7
  Component Side w10: R79.1@21067.14,9604.39 C158.1@21067.14,9681.52 ; R79.1@21072.14,9602.27 21184.38,9602.27 21229.38,9557.27 21229.38,9487.27 21265.17,9451.48 U39.6@21370.91,9451.48 21418.59,9451.48 21444.14,9477.03 R80.2@21444.14,9596.52
NetC158_2: C158.2 R78.1 R79.2 U39.2 | length 278.1
  Component Side w10: C158.2@21004.14,9681.52 R79.2@21004.14,9604.39 21004.14,9601.52 21067.14,9538.53 R78.1@21067.14,9527.27 21092.53,9501.87 U39.2@21154.38,9501.87
NetC159_1: C159.1 R86.1 R87.2 U42.6 | length 700.4
  Component Side w10: C159.1@21065.09,8876.52 R86.1@21065.09,8796.89 21174.75,8796.89 21224.38,8747.27 21224.38,8682.27 21270.17,8636.48 U42.6@21370.91,8636.48 21423.59,8636.48 21442.1,8654.98 R87.2@21442.1,8786.52
NetC159_2: C159.2 R85.1 R86.2 U42.2 | length 287.2
  Component Side w10: C159.2@21002.1,8876.52 R86.2@21002.1,8796.89 21065.09,8733.9 R85.1@21065.09,8717.27 21095.48,8686.87 U42.2@21154.38,8686.87
NetC161_2: C161.2 R87.1 U43.3 | length 324.6
  Component Side w10: R87.1@21504.62,8786.99 C161.2@21504.62,8863.01 ; R87.1@21505.09,8786.52 21469.38,8750.81 21469.38,8662.27 21494.69,8636.95 U43.3@21568.43,8636.95
NetDRAIN_1: DRAIN.1 K20.6 | length 201.9
  Component Side w20: DRAIN.1@17118.18,10545.73 K20.6@17320.12,10545.73
NetDRAIN_2: DRAIN.2 K20.3 | length 364.2
  Component Side w20: DRAIN.2@17208.99,10443.82 17267.35,10502.17 17488.68,10502.17 ; 17489.38,10502.27 17532.03,10544.91
NetGATE_1: GATE.1 K18.6 | length 203.7
  Component Side w20: GATE.1@17115.56,7389.27 K18.6@17319.29,7389.27
NetGATE_2: GATE.2 K18.3 | length 378.4
  Component Side w20: GATE.2@17208.6,7293.88 17261.01,7346.28 17509.44,7346.28 K18.3@17548.91,7385.75
NetJ1_2: J1.2 R100.1 R101.1 U44.7 | length 598
  Component Side w10: U44.7@24650.91,6321.87 R100.1@24741.98,6321.87 ; R101.1@24745.13,6414.51 R100.1@24745.13,6330.02 25116.17,6330.02 J1.2@25152.51,6366.36
NetJ1_3: J1.3 R100.2 R102.1 U44.6 | length 577.3
  Component Side w10: U44.6@24650.91,6271.48 R100.2@24745.68,6271.48 ; R102.1@24745.13,6180.02 R100.2@24745.13,6267.03 ; R100.2@24745.68,6267.03 J1.3@25141.22,6267.03
NetK14_4: K14.4 R60.2 R61.1 U32.5 | length 1501
  Component Side w10: v1(20189.38,6512.27) 20568.92,6512.27 20604.63,6476.56 R61.1@20604.63,6441.52 20604.63,6358.49 20710.85,6252.27 20710.85,6165.34 20755.1,6121.08 U32.5@20830.46,6121.08
  Solder Side w10: v1(20189.38,6512.27) 20189.38,6012.27 K14.4@20244.38,5957.27
NetK14_6: K14.6 R60.1 U32.1 U32.2 | length 463.1
  Component Side w10: K14.6@20244.38,6358.01 R60.1@20541.17,6358.01 20541.17,6345.02 U32.1@20613.92,6272.27 U32.2@20613.92,6221.87
NetK15_4: K15.4 R67.2 R68.1 U35.5 | length 1545.2
  Component Side w10: v1(20194.38,7202.27) 20579.38,7202.27 20612.14,7169.51 R68.1@20612.14,7121.52 20612.14,7038.49 20709.38,6941.24 20709.38,6832.27 20755.56,6786.08 U35.5@20830.91,6786.08
  Solder Side w10: v1(20194.38,7202.27) 20194.38,6677.27 K15.4@20244.38,6627.27
NetK15_6: K15.6 R67.1 U35.1 U35.2 | length 482.7
  Component Side w10: K15.6@20244.38,7038.01 R67.1@20548.67,7038.01 20548.67,7002.97 U35.1@20614.38,6937.27 U35.2@20614.38,6886.87
NetK16_4: K16.4 R74.2 R75.1 U38.5 | length 1579.1
  Component Side w10: v1(20189.38,9872.27) 20564.38,9872.27 20612.14,9824.51 R75.1@20612.14,9791.52 R74.2@20612.14,9703.49 ; R74.2@20611.66,9703.01 20611.66,9654.98 20714.38,9552.27 20714.38,9457.27 20745.56,9426.08 U38.5@20830.91,9426.08
  Solder Side w10: v1(20189.38,9872.27) 20189.38,9352.27 K16.4@20244.38,9297.27
NetK16_6: K16.6 R74.1 U38.1 U38.2 | length 507.7
  Component Side w10: K16.6@20244.38,9703.01 R74.1@20548.67,9703.01 20548.67,9642.97 U38.1@20614.38,9577.27 U38.2@20614.38,9526.87
NetK17_4: K17.4 R81.2 R82.1 U41.5 | length 1520.2
  Component Side w10: v1(20194.38,9067.27) 20574.38,9067.27 20611.66,9029.98 20611.66,8918.01 ; R81.2@20614.62,8898.01 20614.62,8882.03 20719.38,8777.27 20719.38,8687.27 20765.56,8641.08 U41.5@20830.91,8641.08
  Solder Side w10: v1(20194.38,9067.27) 20194.38,8547.27 K17.4@20244.38,8497.27
NetK17_6: K17.6 R81.1 U41.1 U41.2 | length 489.9
  Component Side w10: K17.6@20245.13,8898.01 R81.1@20548.67,8898.01 ; R81.1@20551.62,8898.01 R81.1@20548.67,8898.01 ; U41.2@20614.38,8741.87 U41.1@20614.38,8792.27 20548.67,8857.97 R81.1@20548.67,8898.01
NetK19_3: K19.3 SUB.2 | length 392.8
  Component Side w20: SUB.2@17206.98,8871.2 17261.18,8925.4 17508.59,8925.4 K19.3@17557.2,8974.01
NetK19_6: K19.6 SUB.1 | length 202.1
  Component Side w20: SUB.1@17103.87,8969.67 K19.6@17306.01,8969.67
NetL1_1: L1.1 USB.5 USB.6 | length 1064.7
  Component Side w10: L1.1@24639.38,8562.27 24693.47,8616.35 USB.5@25131.66,8616.35 ; USB.6@25142.53,8066.35 USB.5@25142.53,8616.35
NetR1_1: R1.1 X1.3 | length 102.5
  Component Side w10: R1.1@23564.89,7214.79 X1.3@23564.89,7317.27
NetR1_2: R1.2 U1.6 | length 220.1
  Component Side w10: U1.6@23550.32,6917.21 R1.2@23550.32,7137.27
NetR2_1: R2.1 U1.60 | length 270.8
  Component Side w10: U1.60@23719.61,6767.6 23926.21,6767.6 R2.1@23971.62,6813.01
NetR8_1: R8.1 U24.6 | length 223.5
  Component Side w20: U24.6@18990.17,5818.8 18990.17,5883.05 19014.38,5907.27 R8.1@19139.38,5907.27
NetR16_2: R16.2 R17.2 U22.3 | length 278
  Component Side w10: R16.2@18054.38,7032.27 R17.2@18054.38,7137.27 18124.38,7137.27 18183.59,7196.48 U22.3@18202.84,7196.48
NetR22_2: R22.2 R23.2 U23.3 | length 288.3
  Component Side w10: R22.2@18049.38,8267.27 R23.2@18049.38,8381.02 ; R23.2@18069.38,8382.27 18109.38,8382.27 18168.59,8441.48 U23.3@18219.38,8441.48
NetR34_2: R34.2 R35.2 U29.3 | length 326.6
  Component Side w10: R34.2@18054.38,6162.27 R35.2@18054.38,6272.27 18119.38,6272.27 18183.59,6336.48 U29.3@18244.38,6336.48
NetR36_2: R36.2 R37.2 U30.3 | length 295.4
  Component Side w10: R36.2@18049.38,9332.27 R37.2@18049.38,9437.27 18124.38,9437.27 18173.59,9486.48 U30.3@18219.38,9486.48
NetR40_1: R40.1 USB.2 | length 366.5
  Component Side w10: R40.1@24652.37,8296.24 USB.2@25018.86,8296.24
NetR41_1: R41.1 USB.3 | length 368.9
  Component Side w10: R41.1@24652.37,8376.24 USB.3@25021.31,8376.24
NetR62_1: R62.1 U32.6 U32.7 | length 238.7
  Component Side w10: U32.7@20830.46,6221.87 U32.6@20830.46,6171.48 20880.17,6171.48 20928.63,6123.01 R62.1@20998.67,6123.01
NetR62_2: R62.2 R63.2 U33.3 | length 168.1
  Component Side w10: R63.2@21063.2,6044.55 21063.2,6121.48 U33.3@21154.38,6121.48
NetR69_1: R69.1 U35.6 U35.7 | length 235.8
  Component Side w10: U35.7@20830.91,6886.87 U35.6@20830.91,6836.48 20890.17,6836.48 20937.76,6788.89 R69.1@20996.62,6788.89
NetR69_2: R69.2 R70.2 U36.3 | length 175.8
  Component Side w10: R70.2@21059.62,6713.01 R69.2@21059.62,6788.89 21072.03,6776.48 U36.3@21154.38,6776.48
NetR76_1: R76.1 U38.6 U38.7 | length 234.1
  Component Side w10: U38.7@20830.91,9526.87 U38.6@20830.91,9476.48 20977.33,9476.48 R76.1@21003.67,9450.14
NetR76_2: R76.2 R77.2 U39.3 | length 166.3
  Component Side w10: R77.2@21066.66,9373.01 R76.2@21066.66,9450.14 ; R76.2@21069.62,9440.06 R76.2@21069.62,9448.01 ; R76.2@21073.2,9451.48 U39.3@21154.38,9451.48
NetR83_1: R83.1 U41.6 U41.7 | length 243.4
  Component Side w10: U41.7@20830.91,8741.87 U41.6@20830.91,8691.48 20880.17,8691.48 20934.01,8637.64 R83.1@21001.62,8637.64
NetR83_2: R83.2 R84.2 U42.3 | length 168.2
  Component Side w10: R84.2@21064.62,8558.01 R83.2@21064.62,8637.64 ; R83.2@21065.78,8636.48 U42.3@21154.38,8636.48
NetR90_1: R90.1 R91.1 U24.1 | length 156.5
  Component Side w10: R90.1@18817.88,5517.27 18817.88,5602.27 U24.1@18889.38,5602.27
NetR103_1: R103.1 R104.1 RS485_2.1 U45.7 | length 790.1
  Component Side w10: U45.7@24015.91,5826.87 R103.1@24146.98,5826.87 ; R103.1@24155.13,5835.02 R104.1@24155.13,5913.01
  Component Side w20: R103.1@24155.13,5835.02 RS485_2.1@24736.12,5835.02
NetR103_2: R103.2 R105.1 RS485_2.2 U45.6 | length 811.4
  Component Side w10: U45.6@24015.91,5776.48 R103.2@24150.68,5776.48 ; R105.1@24155.13,5690.02 R103.2@24155.13,5772.03
  Component Side w20: R103.2@24155.13,5772.03 RS485_2.2@24749.79,5772.03
NetSOURCE_2: SOURCE.2 U24.2 U24.7 | length 84.6
  Component Side w10: U24.2@18939.77,5602.27 18939.77,5686.87
NetU1_5: U1.5 X1.1 | length 437.2
  Component Side w10: 23569.69,7052.58 23659.38,7142.27 X1.1@23659.38,7317.27 ; U1.5@23570,6917.21 23570,7052.58
PGA_OUT: R13.1 U8.7 | length 1781.9
  Component Side w10: U8.7@20017.29,5693.21 20118.43,5693.21 20394.38,5417.27 21485.88,5417.27 R13.1@21626.62,5558.01
RS485_RE: U1.58 U44.2 U44.3 | length 1174.1
  Component Side w10: U1.58@23719.61,6728.23 v1(24284.38,6728.23) ; v1(24364.38,6271.48) U44.3@24434.38,6271.48 ; U44.3@24434.38,6267.27 U44.3@24434.38,6271.48 ; U44.2@24434.38,6317.66 U44.3@24434.38,6271.48
  Solder Side w10: v1(24284.38,6728.23) 24284.38,6347.27 v1@24360.17,6271.48 ; v1(24364.38,6271.48) v1@24364.38,6272.27
RS485_RE2: U1.39 U45.2 U45.3 | length 1056.4
  Component Side w10: U1.39@23471.58,6480.2 23471.58,5820.07 23515.17,5776.48 U45.3@23799.38,5776.48 U45.2@23799.38,5826.87
SOURCE_DRIVE: C41.1 R19.2 R91.2 U29.1 U29.5 U35.3 | length 5038.5
  Component Side w10: U29.1@18244.38,6437.27 18324.38,6437.27 18349.38,6412.27 18349.38,6312.27 18375.56,6286.08 U29.5@18460.91,6286.08 v3@18646.31,6286.08 ; v3(18649.38,5442.27) 18654.38,5437.27 v3(19729.38,5437.27) ; v3(18650.13,5601.52) R91.2@18754.14,5601.52 ; v3(19874.38,6836.48) U35.3@20614.38,6836.48
  Component Side w20: R19.2@18054.38,6382.27 18054.38,6437.27 ; C41.1@18054.38,6492.27 18054.38,6437.27 ; U29.1@18244.38,6437.27 18054.38,6437.27
  Solder Side w10: v3@18650.13,5451.52 v3(18650.13,5601.52) v3(18650.13,6282.27) v3@18650.13,6286.52 ; v3@19729.38,5442.27 19729.38,5782.27 19874.38,5927.27 v3(19874.38,6836.48)
SOURCE_OUT: C72.1 R18.1 U3.7 | length 7391.1
  Component Side w10: R18.1@18054.38,6602.27 18059.38,6607.27 18054.38,6612.27 18054.38,6722.27 18149.38,6817.27 v3@18674.38,6817.27 ; v3(18689.38,9322.27) v3(19949.38,9322.27) ; v3@19964.38,7737.27 v3(19969.38,7737.27) 20982.88,7737.27 C72.1@21027.14,7781.52 21041.7,7796.08 U3.7@21194.38,7796.08
  Solder Side w10: v3(18689.38,6817.27) v3@18689.38,9317.27 ; v3(19949.38,9322.27) 19949.38,7757.27 v3(19969.38,7737.27)
STAGE1_OUT: K1.6 K2.6 K3.6 K4.6 K9.6 K10.6 K11.6 K12.6 K13.6 R8.2 R9.1 U8.1 | length 4738.1
  Component Side w10: R9.1@19447.88,5767.27 v2(19554.38,5767.27) 19669.38,5767.27 19684.38,5752.27 U8.1@19824.38,5752.27
  Component Side w20: R8.2@19204.62,5903.01 v2@19558.63,5903.01
  Solder Side w30: K12.6@19454.38,6132.27 19554.38,6132.27 ; K11.6@19454.38,6487.27 19554.38,6487.27 ; K10.6@19454.38,6827.27 19554.38,6827.27 ; K9.6@19454.38,7172.27 19554.38,7172.27 ; K4.6@19454.38,7522.27 19554.38,7522.27 ; K3.6@19454.38,7872.27 19554.38,7872.27 ; K2.6@19454.38,8222.27 19554.38,8222.27 ; K1.6@19454.38,8572.27 19554.38,8572.27 ; K13.6@19454.38,8927.27 19554.38,8827.27 19554.38,8572.27 ; v2(19554.38,5767.27) v2(19554.38,5907.27) 19554.38,6132.27 ; 19554.38,6132.27 19554.38,6487.27 ; 19554.38,6487.27 19554.38,6827.27 ; 19554.38,6827.27 19554.38,7172.27 ; 19554.38,7172.27 19554.38,7522.27 ; 19554.38,7522.27 19554.38,7872.27 ; 19554.38,7872.27 19554.38,8222.27 ; 19554.38,8222.27 19554.38,8572.27
SUB_GUARD: K19.4 U23.6 U23.7 | length 1640
  Component Side w20: K19.4@17579.38,9057.27 17899.38,9057.27 17939.38,9017.27 v2(18529.38,9017.27) ; U23.6@18435.91,8441.48 U23.7@18435.91,8491.87 v2@18534.38,8491.87
  Solder Side w20: v2(18534.38,8492.66) v2@18534.38,9017.27
SUB_OUT: C75.1 R21.1 U4.7 | length 5107.4
  Component Side w10: R21.1@18049.38,8722.27 v3(18049.38,8832.27) ; v3(18049.38,9072.27) v3(18609.38,9072.27) ; v3(18609.38,9417.27) v3(19799.38,9417.27) ; v3(19834.38,8137.27) 20982.88,8137.27 C75.1@21027.14,8181.52 ; C75.1@21034.38,8182.27 21048.99,8196.87 U4.7@21195.17,8196.87
  Solder Side w10: v3(18049.38,8832.27) v3(18049.38,9072.27) ; v3(18609.38,9072.27) v3@18609.38,9407.27 ; v3(19799.38,9417.27) 19799.38,8172.27 v3(19834.38,8137.27)
SUB_SIGNAL: C39.2 K19.5 R20.2 U23.1 U23.5 U41.3 | length 6779.5
  Component Side w10: v3(17879.38,9997.27) v3(19874.38,9997.27) ; U23.1@18219.38,8542.27 18264.38,8542.27 18314.38,8492.27 18314.38,8457.27 18380.56,8391.08 U23.5@18435.91,8391.08 ; v3(19874.38,8691.48) U41.3@20614.38,8691.48
  Component Side w20: K19.5@17350.12,9056.53 17394.38,9012.27 17759.38,9012.27 17804.38,8967.27 v2(17879.38,8967.27) 17999.38,8967.27 18124.38,8842.27 18124.38,8687.27 C39.2@18049.38,8612.27 18049.38,8542.27 ; R20.2@18049.38,8497.27 18049.38,8542.27 ; U23.1@18219.38,8542.27 18049.38,8542.27
  Solder Side w10: v2(17879.38,8967.27) v3(17879.38,9997.27) ; v3(19874.38,8691.48) v3(19874.38,9997.27)
SWCLK: DL.2 U1.49 | length 4501.6
  Component Side w10: U1.49@23719.61,6551.06 23890.58,6551.06 24044.38,6397.27 24204.38,6397.27 24359.38,6552.27 24359.38,9187.27 24504.38,9332.27 DL.2@25387.79,9332.27 ; DL.2@25378.02,9332.15 DL.2@25388.49,9332.15
SWDIO: DL.3 DL.4 U1.46 | length 5002.2
  Component Side w10: U1.46@23609.37,6480.2 23609.37,6292.27 23654.38,6247.27 24099.38,6247.27 24394.38,6542.27 24394.38,9112.27 24504.38,9222.27 25427.55,9222.27 25453.49,9248.21 25453.49,9344.72 25440.48,9357.74 25378.02,9357.74 DL.4@25378.02,9383.33
UART3_RX: LCD.5 U1.30 | length 3116
  Component Side w10: v1(22884.38,6537.27) 22979.38,6537.27 23032.55,6590.43 U1.30@23282.6,6590.43
  Solder Side w10: v1(22884.38,6537.27) 22884.38,8957.27 LCD.5@23079.38,9152.27
UART3_TX: LCD.3 LCD.4 U1.29 | length 2889.8
  Component Side w10: v1(22939.38,6577.27) 22972.23,6610.12 U1.29@23282.6,6610.12
  Solder Side w10: v1(22939.38,6577.27) 22939.38,8812.27 LCD.3@23079.38,8952.27 LCD.4@23079.38,9052.27
USART1_RX: U1.43 U44.1 | length 1262.7
  Component Side w10: U1.43@23550.32,6480.2 23550.32,6221.33 23619.38,6152.27 24134.38,6152.27 24354.38,6372.27 U44.1@24434.38,6372.27
USART1_TX: U1.42 U44.4 | length 1257
  Component Side w10: U1.42@23530.63,6480.2 23530.63,6201.01 23609.38,6122.27 24149.38,6122.27 24249.38,6222.27 U44.4@24434.38,6222.27
USART2_RX: U1.17 U45.1 | length 3335
  Component Side w10: v1(22569.38,7212.27) 22864.38,6917.27 23134.38,6917.27 23205.31,6846.34 U1.17@23282.6,6846.34 ; v1@23523.36,5877.27 U45.1@23799.38,5877.27
  Solder Side w10: v1(22569.38,7212.27) 22569.38,6027.27 22719.63,5877.02 v1@23516.36,5877.02
  other v1: 23518.02,5876.39
USART2_TX: U1.16 U45.4 | length 3673.2
  Component Side w10: v1(22519.38,7272.27) 22569.38,7272.27 22774.38,7067.27 23269.38,7067.27 23353.47,6983.18 U1.16@23353.47,6917.21 ; v1@23514.12,5726.08 U45.4@23799.38,5726.08
  Solder Side w10: v1(22519.38,7272.27) 22519.38,6007.27 22801.85,5724.8 v1@23505.47,5724.8
  other v1: 23510.73,5724.64
USB_DM: R40.2 U1.44 | length 3164.4
  Component Side w10: U1.44@23570,6480.2 23570,6241.64 23629.38,6182.27 24124.38,6182.27 24474.38,6532.27 24474.38,8227.27 24539.38,8292.27 R40.2@24604.38,8292.27
USB_DP: R41.2 R42.2 U1.45 | length 3169.1
  Component Side w10: U1.45@23589.69,6480.2 23589.69,6266.96 23644.38,6212.27 24109.38,6212.27 24439.38,6542.27 24439.38,8276.22 R42.2@24540.4,8377.24 ; R42.2@24539.38,8377.27 R41.2@24609.38,8377.27
pads on no net: DL.1 J1.1 J1.4 J1.5 J1.6 J1.7 J1.8 J1.9 J1.10 J1.11 K1.1 K1.3 K2.1 K2.3 K3.1 K3.3 K4.1 K4.3 K9.1 K9.3 K10.1 K10.3 K11.1 K11.3 K12.1 K12.3 K13.1 K13.3 K14.1 K14.3 K15.1 K15.3 K16.1 K16.3 K17.1 K17.3 K18.2 K18.7 K19.2 K19.7 K20.2 K20.7 LCD.6 U1.7 U3.2 U3.6 U3.8 U4.2 U4.6 U4.8 U5.1 U5.3 U5.5 U5.7 U5.8 U9.1 U9.5 U9.6 U19.1 U19.3 U19.5 U19.7 U19.8 U24.3 U29.6 U29.7 U33.1 U33.5 U33.8 U36.1 U36.5 U36.8 U39.1 U39.5 U39.8 U42.1 U42.5 U42.8 USB.1
copper on no net:
  other v4: 25524.01,9215.02 25524.01,9500.45
  other v5: 25418.49,9262.27 25418.49,9453.21

## Polygon pours and split planes (outlines as drawn)
AGND on Component Side "Top Side-AGND" (solid, remove dead copper, pour order 14): 16941.13,4922.96 16941.34,4923.18 16941.34,12319.73 25475.81,12319.73 25476.09,12319.45 25562.27,12233.27 25562.8,12233.27 25562.8,9736.15 25562.91,9736.04 25562.47,9735.59 22629.74,9735.59 22629.74,9734.76 22139.95,9244.97 22139.97,9244.96 22139.97,4923.18
DGND on Component Side "Top Side-DGND" (solid, remove dead copper, pour order 10): 22175.54,4923.33 22175.54,9237.59 22175.45,9237.68 22643.31,9705.55 22659.5,9705.55 25562.53,9705.55 25562.59,9705.49 25563.34,9704.73 25563.34,5010.32 25563.06,5010.32 25475.82,4923.09
NetSOURCE_2 on Component Side "TOP_GND" (solid, remove dead copper, pour order 4): 16950.12,5966.05 16950.12,5676.05 18946.5,5676.05 18946.5,5891.05 18888.41,5891.05 18888.41,9106.05 18680.12,9106.05 18680.12,5966.05
AGND on Solder Side "Bot Side-AGND" (solid, remove dead copper, pour order 16): 16941.13,4922.96 16941.34,4923.18 16941.34,12319.73 25475.81,12319.73 25476.09,12319.45 25562.27,12233.27 25562.8,12233.27 25562.8,9736.15 25562.91,9736.04 25562.47,9735.59 22629.74,9735.59 22629.74,9734.76 22139.95,9244.97 22139.97,9244.96 22139.97,4923.18
DGND on Solder Side "Bot Side-DGND" (solid, remove dead copper, pour order 12): 22175.54,4923.33 22175.54,9237.59 22175.45,9237.68 22643.31,9705.55 22659.5,9705.55 25562.53,9705.55 25562.59,9705.49 25563.34,9704.73 25563.34,5010.32 25563.06,5010.32 25475.82,4923.09
DGND on Ground Plane (split plane): 25562.46,5009.69 25475.81,4923.04 22175.2,4923.04 22175.2,9237.5 22643.67,9705.98 25562.46,9705.98
AGND on Ground Plane (split plane): 25562.46,12233.2 25562.46,9736.12 22635.12,9736.12 22632.18,9735.83 22629.35,9734.97 22626.75,9733.58 22624.47,9731.71 22622.59,9729.42 22621.2,9726.82 22620.9,9725.84 22155.33,9260.27 22154.35,9259.97 22151.75,9258.58 22149.47,9256.71 22147.59,9254.42 22146.2,9251.82 22145.34,9248.99 22145.05,9246.05 22145.05,4923.04 16941.24,4923.04 16941.24,12319.85 25475.81,12319.85
D3V3 on Power Plane (split plane): 25562.46,5009.69 25475.81,4923.04 22170.2,4923.04 22170.2,9230.36 22170.91,9230.94 22640.94,9700.98 25562.46,9700.98
AGND on Power Plane (split plane): 25562.46,12233.2 25562.46,9731.12 22639.04,9731.12 22638.19,9731.38 22635.25,9731.67 22632.31,9731.38 22631.45,9731.12 22630.12,9731.12 22627.18,9730.83 22624.35,9729.97 22621.75,9728.58 22619.47,9726.71 22617.59,9724.42 22616.2,9721.82 22615.34,9718.99 22615.23,9717.9 22153.27,9255.94 22152.18,9255.83 22149.35,9254.97 22146.75,9253.58 22144.47,9251.71 22142.59,9249.42 22141.2,9246.82 22140.34,9243.99 22140.05,9241.05 22140.05,4923.04 16941.24,4923.04 16941.24,12319.85 25475.81,12319.85

## Keep-outs
Keep-Out Layer:
  circle w10: c25473.9,5121.44 r53.15
  circle w10: c17061.69,5121.44 r53.15
  circle w10: c17061.69,12121.44 r53.15
  circle w10: c25473.9,12121.44 r53.15
  lines w10: 16921.14,4902.94 25484.13,4902.94 25582.56,5001.36 25582.56,12241.52 25484.13,12339.95 16921.14,12339.95

## Other copper
Component Side:
  rectangle net DGND: 23562.43,8796.64 23624.94,8843.93
  rectangle net D3V3: 23749.38,8857.27 23944.38,9022.27
  rectangle net DGND: 23562.43,8786.44 23624.94,8796.64
  rectangle net DGND: 23044.38,8722.27 23284.38,8882.27
  pour cut-out: 25291.16,5272.48 25291.16,4902.94 25581.16,4902.94 25581.16,5272.48
  pour cut-out: 25293.63,12340.32 25293.63,11970.77 25583.63,11970.77 25583.63,12340.32
  pour cut-out: 16920.62,12340.02 16920.62,11970.47 17210.62,11970.47 17210.62,12340.02
  pour cut-out: 16921.76,5272.25 16921.76,4902.7 17211.76,4902.7 17211.76,5272.25
Ground Plane (plane layer: these items are gaps in the copper):
  lines w30: 22160.12,4901.29 22160.12,9246.05 ; 22162.22,9245.84 22637.22,9720.84 ; 22635.12,9721.05 25586.97,9721.05
Power Plane (plane layer: these items are gaps in the copper):
  lines w30: 22155.12,4909.81 22155.12,9241.05 ; 22160.25,9241.6 22635.25,9716.6 ; 22630.12,9716.05 25577.56,9716.05

## Silkscreen, mask and mechanical layers (free items; w line width, h text height)
Top Overlay:
  drawing of 2949 lines, arcs and shapes, not listed
  text "+" at 16982.39,11315.48 h60
  text "+" at 16979.77,10845.2 h60
  text "SA6101  V1.07_E3  171129" at 22679.38,10002.27 h100
  text "+" at 22884.38,9287.27 h100
  text "-" at 22889.38,8657.27 h100
Mechanical 1:
  circle w10: c25473.9,5121.44 r53.15
  circle w10: c17061.69,5121.44 r53.15
  circle w10: c17061.69,12121.44 r53.15
  circle w10: c25473.9,12121.44 r53.15
  lines w10: 16921.14,4902.94 25484.13,4902.94 25582.56,5001.36 25582.56,12241.52 25484.13,12339.95 16921.14,12339.95 16921.14,4902.94

## Dimensions
25721.02,4900.05 to 25901.52,12342.7 on Top Overlay
16914.78,4697.61 to 25577.15,4655.5 on Top Overlay

## Text inside footprints (layer, text, board x,y; h text height)
J1: Top Overlay "1" at 25015.43,6482.17 h30 r270; Top Overlay "5" at 25015.43,6055.79 h30 r270; Top Overlay "9" at 25385.51,6110.32 h30 r270; Top Overlay "6" at 25385.51,6437.48 h30 r270
PWR_5V: Top Overlay "-" at 22145.31,11986.69 h100 r270; Top Overlay "+" at 22659.31,11906.69 h100 r90
PWR_20V: Top Overlay "+" at 19699.31,11916.69 h100 r90; Top Overlay "-" at 19185.31,11996.69 h100 r270